# EAGLE board blink - Copy (EAGLE 7.7.0)
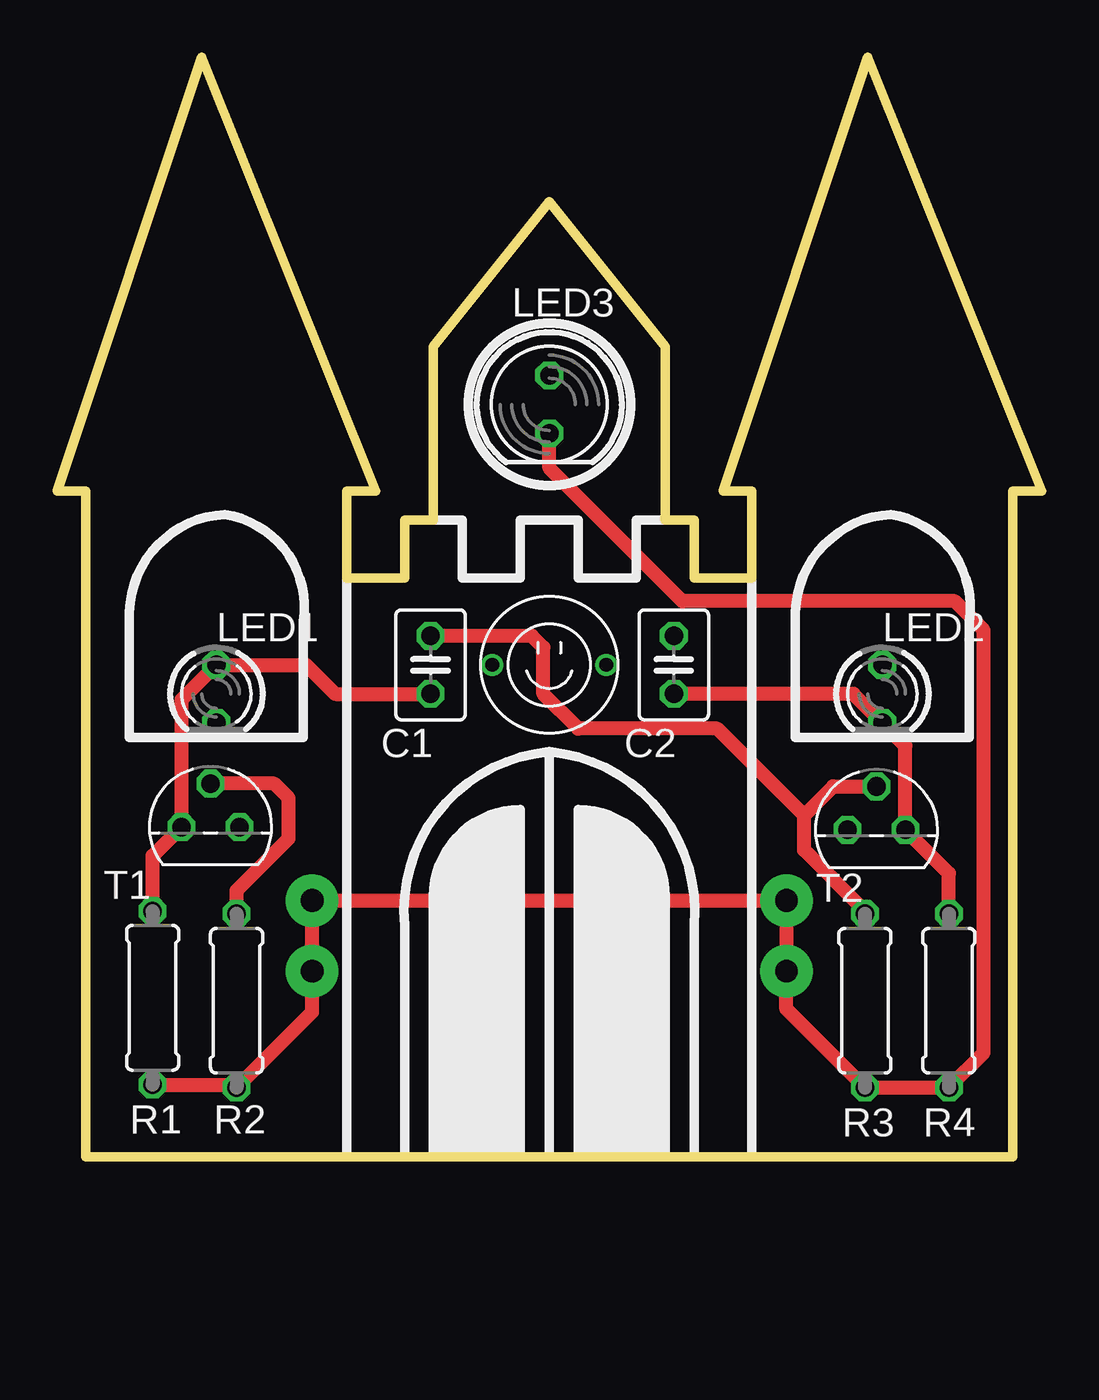
[diagram p0: board, top side]
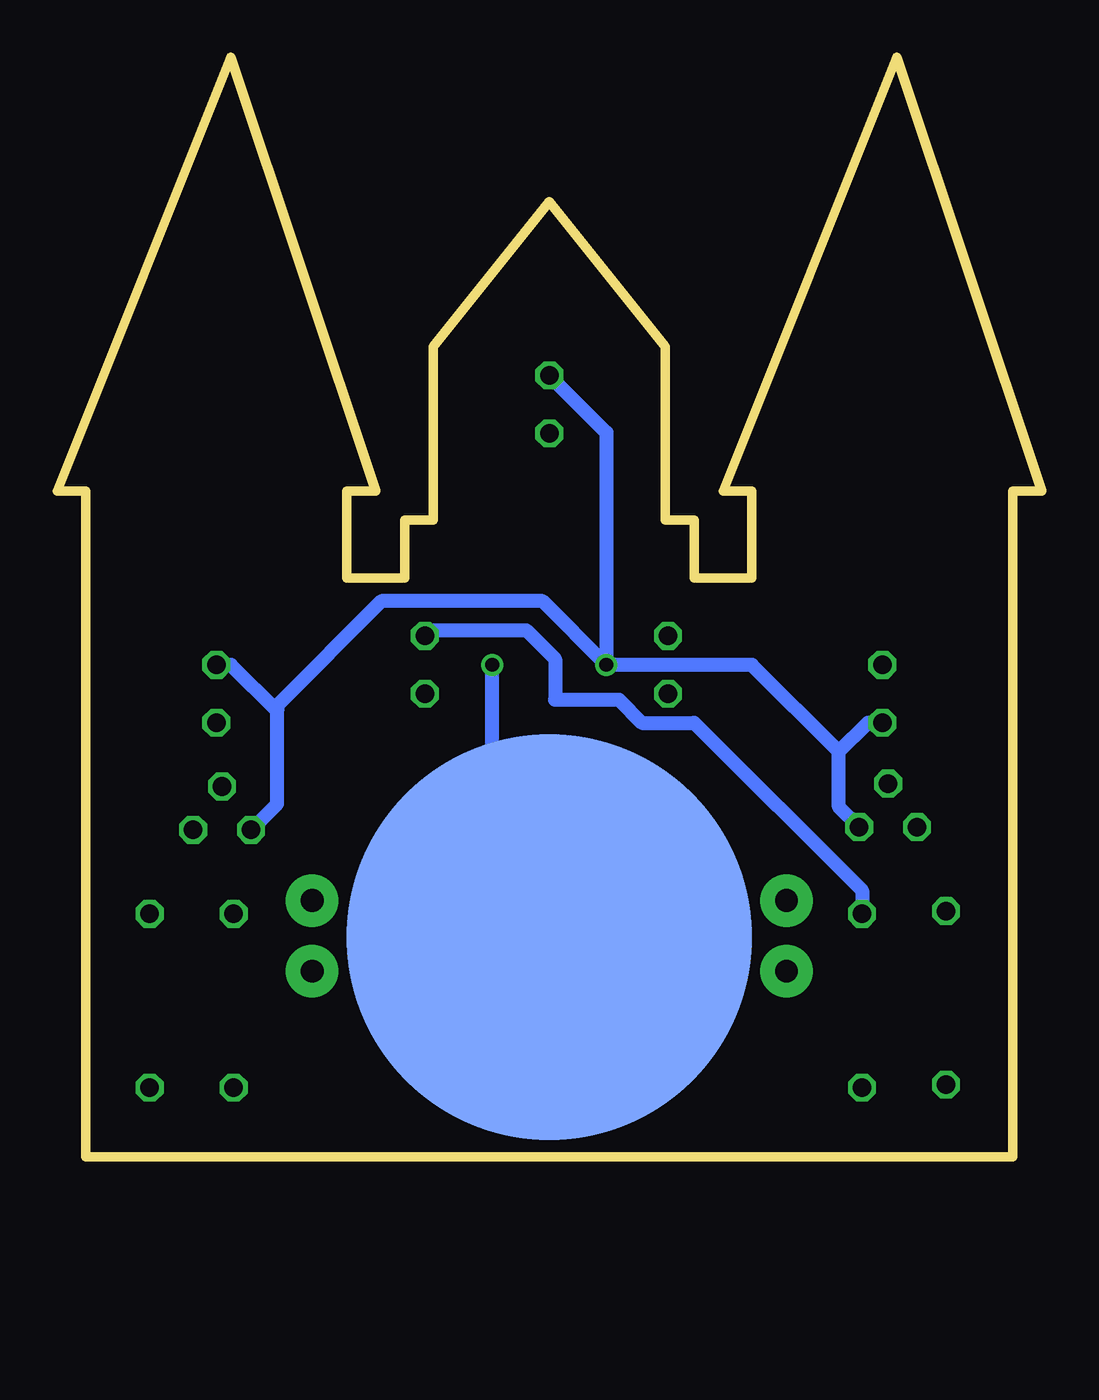
[diagram p1: board, bottom side, seen from below]

Size 43.18 x 48.26 mm. Coordinates in mm from the lower left corner, seen from the top.
Outline: 1.27,0 1.27,29.21 0,29.21 6.35,48.26 13.97,29.21 12.7,29.21 12.7,25.4 15.24,25.4 15.24,27.94 16.51,27.94 16.51,35.56 21.59,41.91 26.67,35.56 26.67,27.94 27.94,27.94 27.94,25.4 30.48,25.4 30.48,29.21 29.21,29.21 35.56,48.26 43.18,29.21 41.91,29.21 41.91,0 1.27,0
Copper layers (1*16): Top 0.0356mm / dielectric 1.5011mm / Bottom 0.0356mm
Design rules "oshpark-2layer": minimum track width 6mil, minimum drill 13mil, track to track 6mil, track to pad 6mil, pad to pad 6mil, via to via 6mil, smd to smd 6mil, copper to edge 15mil, drill to drill 6mil, minimum pad ring 7mil, minimum via ring 7mil, stop-mask expansion 2.5mil, vias tented up to drill 0mil, thermal gap 10mil

## Footprints (pad centres in the part's own frame; a part is rotated, then mirrored left to right if it is on the bottom)
C025-030X050 = drill 0.813 octagon: 1 -1.27,0; 2 1.27,0
LED3MM = drill 0.813 octagon: A -1.27,0; K 1.27,0
LED5MM = drill 0.813 octagon: A -1.27,0; K 1.27,0
0207/7 = drill 0.813 octagon: 1 -3.81,0; 2 3.81,0
TO92 = drill 0.813 octagon: 1 1.27,0; 2 0,1.905; 3 -1.27,0
SPST-5MM = drill 0.6: P$1 -2.5,0; P$2 2.5,0
BAT-HLD-001-THM = drill 1 pad 2.3: P$1 10.4,1.5; P$2 10.4,-1.6; P$3 -10.4,1.5; P$4 -10.4,-1.6 | smd 17.8 x 17.8: P$5 0,0

## Placement (x,y rotation side)
C1  [C025-030X050]  16.38,21.59 90 top
C2  [C025-030X050]  27.05,21.59 90 top
LED1  [LED3MM]  6.98,20.32 270 top
LED2  [LED3MM]  36.2,20.32 270 top
LED3  [LED5MM]  21.59,33.02 270 top
R1  [0207/7]  4.19,6.98 270 top
R2  [0207/7]  7.87,6.86 270 top
R3  [0207/7]  35.43,6.86 270 top
R4  [0207/7]  39.12,6.86 270 top
T1  2N3904  [TO92]  6.73,14.48 0 top
T2  2N3904  [TO92]  35.94,14.35 0 top
U$1  EVQ-11D05B  [SPST-5MM]  21.59,21.59 0 top
U$2  CR2032-GK  [BAT-HLD-001-THM]  21.59,9.65 180 bottom

## Library data of the parts
C1 C2 R1-R4 = resistor
LED1-LED3 = led
T1 T2 = transistor
U$1 = switch
U$2 = battery

## Nets
+3V3: LED3.K R1.2 R2.2 R3.2 R4.2 U$2.P$1 U$2.P$2 U$2.P$3 U$2.P$4
GND: LED1.K LED2.A LED3.A T1.1 T2.3 U$1.P$1
N$1: C1.1 LED1.A R1.1 T1.3
N$2: U$1.P$2 U$2.P$5
N$3: C2.1 LED2.K R4.1 T2.1
N$4: C1.2 R3.1 T2.2
N$5: C2.2 R2.1 T1.2

## Tracks (layer width: path | path; a pad name or v marks a point on that pad's centre or on a via)
+3V3
  Top 0.61: R1.2 7.87,3.18 R2.2 11.19,6.36 U$2.P$3 U$2.P$4 U$2.P$2 U$2.P$1 31.99,6.49 R3.2 R4.2 40.64,4.57 40.64,23.11 39.37,24.38 27.43,24.38 21.59,30.23 LED3.K
GND
  Bottom 0.61: T1.1 8.89,15.37 8.89,17.78 | 8.89,17.78 7.62,19.05 LED1.K | T2.3 33.53,15.49 33.53,19.56 | 33.53,19.56 35.56,21.59 LED2.A | 8.89,17.78 12.7,21.59 U$1.P$1 | U$1.P$1 21.88,24.38 28.96,24.38 33.53,19.81 33.53,19.56 | LED3.A 19.09,31.79 U$1.P$1
N$1
  Top 0.61: R1.1 4.19,13.21 T1.3 5.46,20.07 LED1.A 10.92,21.59 12.19,20.32 C1.1
N$2
  Bottom 0.61: U$2.P$5 24.09,11.39 U$1.P$2
N$3
  Top 0.61: R4.1 39.12,12.45 T2.1 37.21,18.03 LED2.K 34.93,20.32 C2.1
N$4
  Top 0.61: R3.1 35.43,10.79 32.77,13.46 32.77,14.99 | 32.77,14.99 34.04,16.26 T2.2 | 32.77,14.99 28.96,18.8 22.86,18.8 21.34,20.32 21.34,22.35 20.83,22.86 C1.2
N$5
  Top 0.61: R2.1 7.87,11.68 10.16,13.97 10.16,15.75 9.52,16.38 T1.2
  Bottom 0.61: C2.2 26.8,23.11 22.61,23.11 21.34,21.84 21.34,20.07 18.54,20.07 17.53,19.05 15.24,19.05 7.87,11.68 R2.1